# Altium PCB ProxSensorType1.PcbDoc
Units mil, origin at the board's own origin, x right, y up, seen from the top; angles counter-clockwise.
Board outline 1300 x 2050 mil, 2 copper layers (Top Layer, Bottom Layer); 28 components, 23 nets, 78 pads, 14 vias.
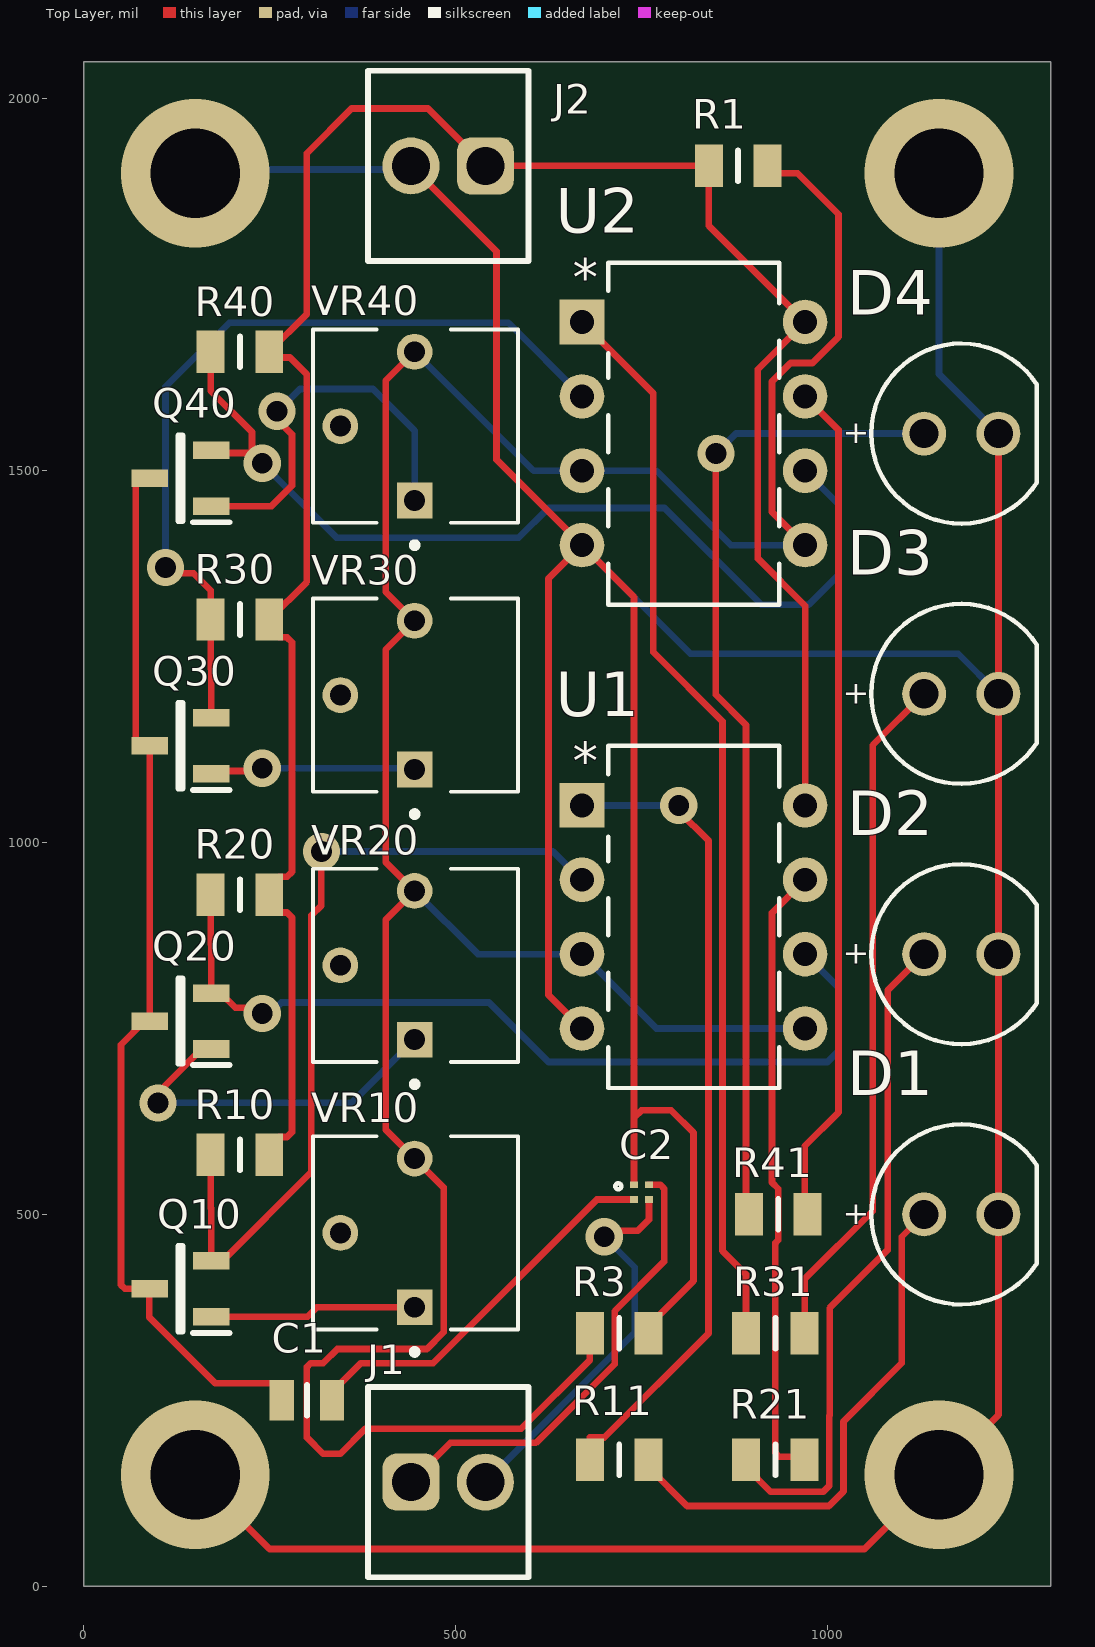
[diagram p0: Top Layer view]
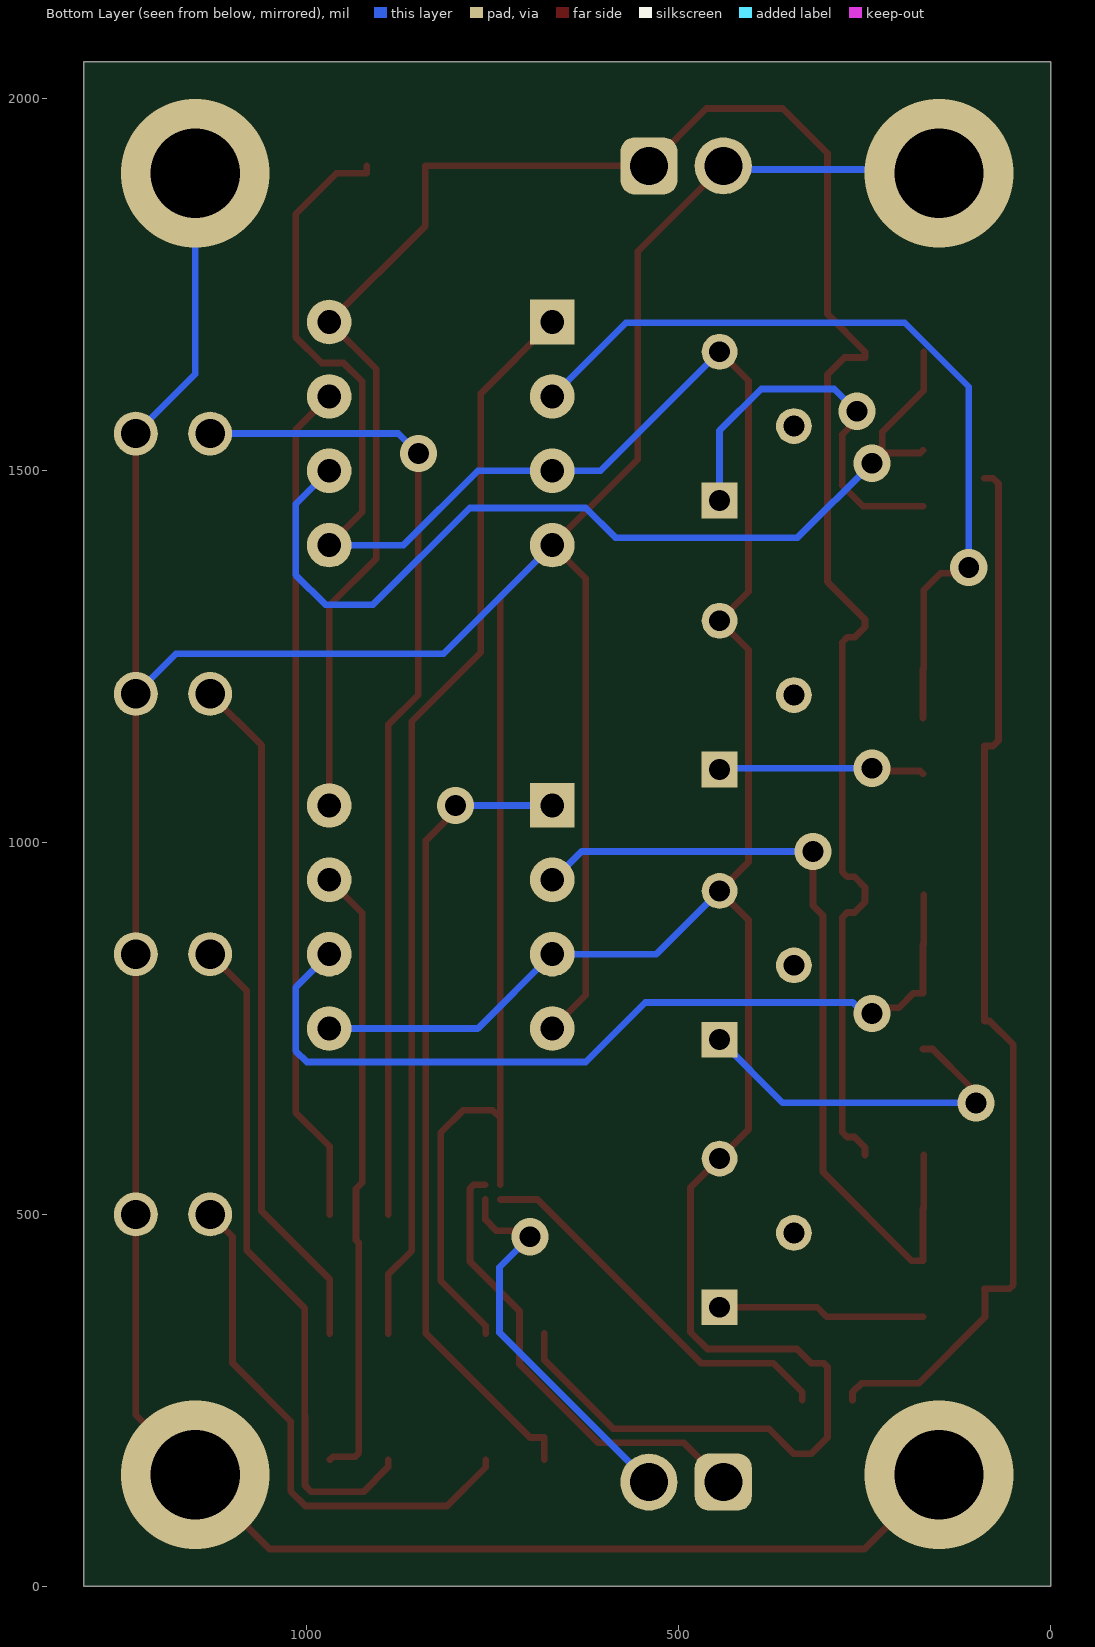
[diagram p1: Bottom Layer view, seen from below]
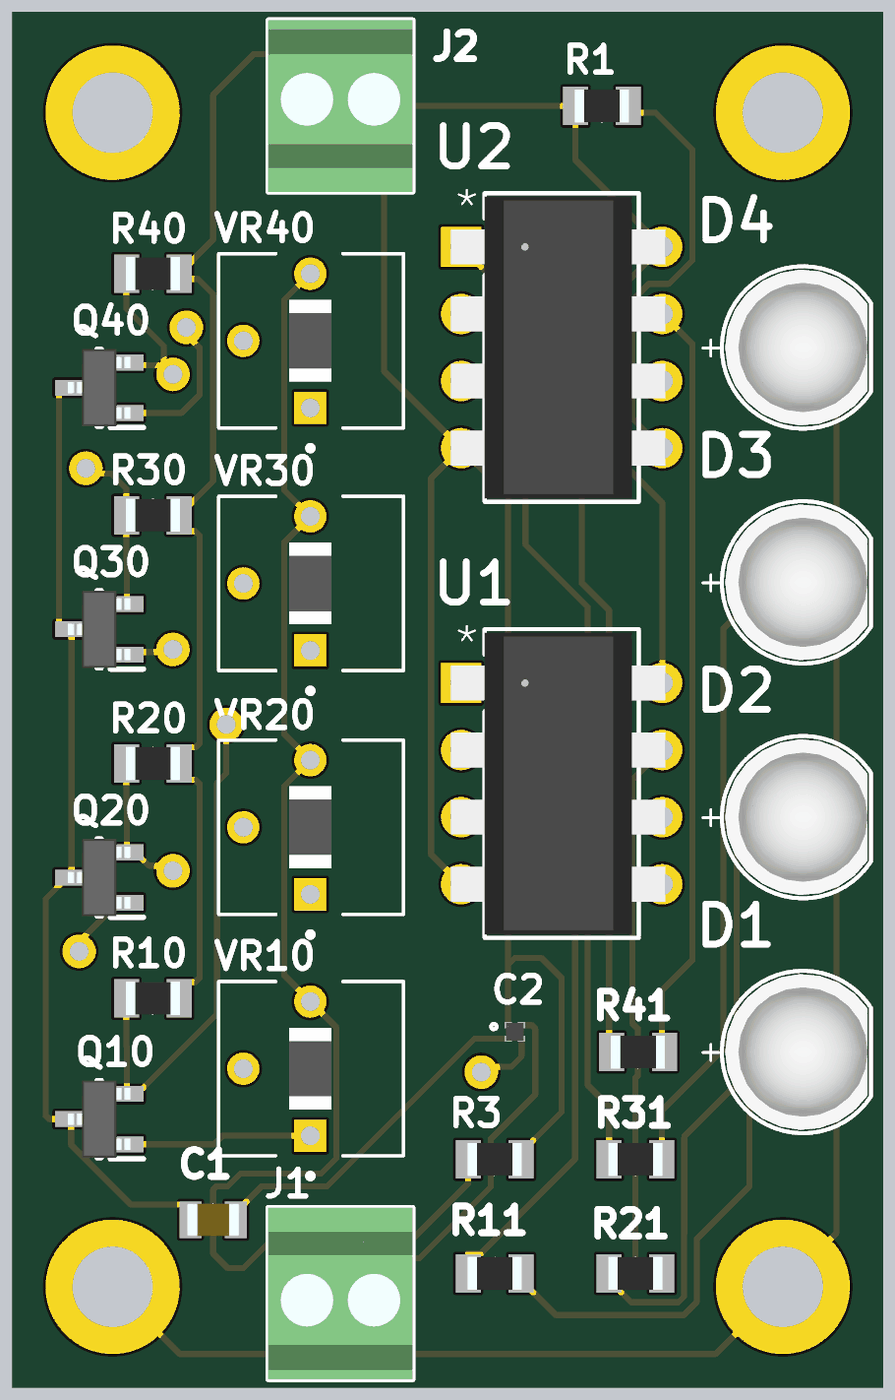
[diagram p2: 3D render of the assembled board from above, using the file's embedded part models]

## Layer stack, top to bottom
Top Solder: solder mask 0.4, Solder Resist, Dk 3.5
Top Layer: signal copper 1.4
Dielectric 1: dielectric 12.6, FR-4, Dk 4.8
Bottom Layer: signal copper 1.4
Bottom Solder: solder mask 0.4, Solder Resist, Dk 3.5

## Board outline
0,0 1300,0 1300,2050 0,2050

## Design rules (kind name [scope] priority, off if disabled: settings)
Clearance [All] p1: gap=10 ignorepadtopadclearanceinfootprint=FALSE except(0: Arc-Hole Track-Hole SMDPad-Hole THPad-Hole Via-Hole Fill-Hole Poly-Hole Region-Hole Text-Hole; 6: SMDPad-SMDPad SMDPad-Fill SMDPad-Poly SMDPad-Region; 7: SMDPad-THPad SMDPad-Via)
HoleSize [All] p1: absolutevalues=TRUE maxlimit=150 minlimit=1 maxpercent=80.000 minpercent=20.000
MinimumSolderMaskSliver [All] p1: minsoldermaskwidth=9
PolygonConnect [All] p1: connectstyle=Relief reliefconductorwidth=10 reliefentries=4 polygonreliefangle="90 Angle" airgapwidth=10
RoutingCorners [All] p1: cornerstyle=45-Degree minsetback=100 maxsetback=300
RoutingVias [All] p1: holewidth=28 width=50 viastyle="Through Hole" minholewidth=28 minwidth=50 maxholewidth=35 maxwidth=100
SMDNeckDown [All] p1: percent=100.000
SilkToSilkClearance [All] p1: silktosilkclearance=0.1
SilkToSolderMaskClearance [IsPad] p1: minsilkscreentomaskgap=4 clearancetoexposedcopper=TRUE
SolderMaskExpansion [All] p1: expansion=4 istentingtop=FALSE
UnRoutedNet [All] p1: checkbadconnections=TRUE
Width [All] p1: maxlimit=30 minlimit=7 preferedwidth=9 minimp=50.000000 maximp=50.000000 favimp=50.000000
24 further rules are at their usual default settings.

## Components (designator, comment, footprint, x,y, rotation, side; value= is the part's Value field where it differs from the comment)
C1 "TMK212BBJ106MG-T" CAPC2012X65N 300,250 r180 top
C2 "LXRW0YV900-053" LXRW-0Y_MUR-M 750,530 r0 top
D1 "Super Red, 2.1V, 40°" WL-TMRC_D5.9H8.7 1180,500 r0 top
D2 "Super Red, 2.1V, 40°" WL-TMRC_D5.9H8.7 1180,850 r0 top
D3 "Super Red, 2.1V, 40°" WL-TMRC_D5.9H8.7 1180,1200 r0 top
D4 "Super Red, 2.1V, 40°" WL-TMRC_D5.9H8.7 1180,1550 r0 top
J1 "691210910002" 691210910002 490,140 r0 top
J2 "691210910002" 691210910002 490,1910 r180 top (schematic designator J?)
Q10 "MMBFJ309LT1G" SOT96P237X111-3N 130,400 r180 top
Q20 "MMBFJ309LT1G" SOT96P237X111-3N 130,760 r180 top
Q30 "MMBFJ309LT1G" SOT96P237X111-3N 130,1130 r180 top
Q40 "MMBFJ309LT1G" SOT96P237X111-3N 130,1490 r180 top
R1 "4,7k" RESC2012X50N 880,1910 r180 top
R3 "10k" RESC2012X50N 720,340 r180 top
R10 "4,7k" RESC2012X50N 210,580 r0 top
R11 "12k" RESC2012X50N 720,170 r180 top
R20 "4,7k" RESC2012X50N 210,930 r0 top
R21 "12k" RESC2012X50N 930,170 r0 top
R30 "4,7k" RESC2012X50N 210,1300 r0 top
R31 "12k" RESC2012X50N 930,340 r180 top
R40 "4,7k" RESC2012X50N 210,1660 r0 top
R41 "12k" RESC2012X50N 933.83,500 r0 top
U1 "LM358" DIP8_300 970,750 r0 top
U2 "LM358" DIP8_300 970,1400 r0 top
VR10 "3362P-1-253LF" TRIM_3362P-1-253LF 445,475.12 r90 top
VR20 "3362P-1-253LF" TRIM_3362P-1-253LF 445,835 r90 top
VR30 "3362P-1-253LF" TRIM_3362P-1-253LF 445,1198.33 r90 top
VR40 "3362P-1-253LF" TRIM_3362P-1-253LF 445,1560 r90 top

## Footprints (in the part's own frame and the unit in brackets; to place one, negate y for a bottom-side part, rotate by r counter-clockwise, add the part's x,y. Pads: shape width x height; smd on the part's side, far side on the other; paste and mask are expansions set on the pad)
691210910002 [mm] "2,54mm - modular - green - Horizontal wire entry - Cage clamp - 0,8mm2 wires - 02p"
  rrect50% 1.95x1.95 hole 1.3: 1(-1.27,0)
  round 1.95 hole 1.3: 2(1.27,0)
  silkscreen extent -2.74,-3.25 2.74,3.25, body extent -2.74,-3.25 2.74,3.25, height 8.55
CAPC2012X65N [mm]
  rect 0.83x1.39 smd: 1(-0.86,0) 2(0.86,0)
  silkscreen extent 0,-0.53 0,0.53, body extent -1,-0.63 1,0.63, height 0.65
DIP8_300 [mil]
  rect 60x60 hole 32: 1(-300,300)
  round 60 hole 32: 2(-300,200) 3(-300,100) 4(-300,0) 5(0,0) 6(0,100) 7(0,200) 8(0,300)
  silkscreen extent -265,-80 -35,380, body extent -315,-75 5,375, height 205
LXRW-0Y_MUR-M [mil]
  rect 11x9 smd paste+0 mask+0: 1(-10,10) 2(-10,-10) 3(10,-10) 4(10,10)
  silkscreen extent -35,4 -27,12, body extent -13,-13 13,13, height 12
RESC2012X50N [mm]
  rect 0.95x1.45 smd: 1(-1,0) 2(1,0)
  silkscreen extent 0,-0.53 0,0.53, body extent -1.02,-0.63 1.02,0.63, height 0.5
SOT96P237X111-3N [mm]
  rect 1.25x0.6 smd: 1(-1.05,0.955) 2(-1.05,-0.955) 3(1.05,0)
  silkscreen extent -1.67,-1.46 0.07,1.51, body extent -1.18,-1.46 1.18,1.46, height 1.11
TRIM_3362P-1-253LF [mil]
  rect 48.11x48.11 hole 28.11: 1(-100,0)
  round 48.11 hole 28.11: 2(0,100) 3(100,0)
  silkscreen extent -164,-139 130,137, body extent -61,-31 61,31, height 26
WL-TMRC_D5.9H8.7 [mm] "THT Mono-color Round Color LED, 2-leads"
  round 1.5 hole 1: 1(-1.27,0) 2(1.27,0)
  silkscreen extent -3.07,-3.07 2.58,3.08, body extent -2.95,-2.95 2.45,2.95, height 9.2

## Part data
C1: "Capacitor", Manufacturer_Name="TAIYO YUDEN", Mouser Part Number=963-TMK212BBJ106MG-T, Datasheet Link=https://ds.yuden.co.jp/TYCOMPAS/ut/download?pn=LMK063BBJ474MPLF&fileType=CA, Height=1.45mm, Manufacturer_Part_Number=TMK212BBJ106MG-T, Mouser Price/Stock=https://www.mouser.co.uk/ProductDetail/Taiyo-Yuden/TMK212BBJ106MG-T?qs=lkMpTOwszhd%2F%252Bg1AlFV9dw%3D%3D
C2: "Cap trimmer (variable capacitor)", Mfr_Name=Murata, Copyright="Copyright (C) 2023 Ultra Librarian. All rights reserved.", Digi-Key_Part_Number_1=490-18380-2-ND, Digi-Key_Part_Number_2=490-18380-1-ND, Digi-Key_Part_Number_3=490-18380-6-ND, Manufacturer_Part_Number=LXRW0YV900-053, RefDes=RefDes, Type=DEV
D1 D2 D3 D4: library part LED_151051SS04000, "WL-TMRC Mono-color Round Color, THT, D5.9 x H8.7mm, Super Red, 2.1V, 40°", Case/Size Code=5mm, Emitting Color="Super Red", Forward Voltage=2.1V, Manufacturer="Wurth Elektronik", Manufacturer Part Number=151051SS04000, Operating Temperature Max=85°C, Operating Temperature Min=-40°C, Category="Signal LEDs", Chip Technology=AlInGaP, ComponentLink1Description="Website Link", ComponentLink1URL=https://www.we-online.com/redexpert/article/151051SS04000?ad, ComponentLink2Description="Datasheet Link", ComponentLink2URL=https://www.we-online.com/redexpert/spec/151051SS04000?ad, Diameter=5.9mm, Dominant Wavelength=635nm, Height=8.7mm, Luminous Intensity=250mcd, Match Code=WL-TMRC, Mount="Through Hole", Packaging=Bulk, Peak Wavelength=640nm, Viewing Angle=40°
J1 J2: "WR-TBL Series 2109 Horizontal Entry, THT, pitch 2.54mm, 2p", Manufacturer="Wurth Elektronik", Operating Temperature Max=105°C, Operating Temperature Min=-40°C, Rated Current=6A, Working Voltage=150V, Application="Rising Cage Clamp", Category="Terminal Blocks", ComponentLink1Description="Website Link", ComponentLink1URL=https://www.we-online.com/redexpert/article/691210910002?ad, ComponentLink2Description="Datasheet Link", ComponentLink2URL=https://www.we-online.com/redexpert/spec/691210910002?ad, Manufacturer Part Number=691210910002, Match Code=WR-TBL, Modularity=No, Mount="Through Hole", Number of Pins=2, Number of Rows=1, Orientation=Horizontal, Packaging=Box, Pitch=2.54mm
Q10 Q20 Q30 Q40: "Transistor", Manufacturer_Name=onsemi, Mouser Part Number=863-MMBFJ309LT1G, Arrow Part Number=MMBFJ309LT1G, Arrow Price/Stock=https://www.arrow.com/en/products/mmbfj309lt1g/on-semiconductor, Datasheet Link=http://www.onsemi.com/pub/Collateral/MMBFJ309LT1-D.PDF, Height=1.11mm, Manufacturer_Part_Number=MMBFJ309LT1G, Mouser Price/Stock=https://www.mouser.co.uk/ProductDetail/onsemi/MMBFJ309LT1G?qs=HVbQlW5zcXXpftXEfcBAsg%3D%3D
R1 R10 R20 R30 R40: library part "RESISTOR 0805", "4,7k Resistor 0805", Manufacturer="Vishay Dale", Part Number=TNPW080510K0BETA
R3: library part "RESISTOR 0805", "10k Resistor 0805", Manufacturer="Vishay Dale", Part Number=TNPW080510K0BETA
R11 R21 R31 R41: library part "RESISTOR 0805", "12k Resistor 0805", Manufacturer="Vishay Dale", Part Number=TNPW080510K0BETA
U1 U2: "Texas instruments LM358 opamp", Mfr_Name="Texas Instruments", Copyright="Copyright (C) 2023 Ultra Librarian. All rights reserved.", Manufacturer_Part_Number=LM358, RefDes=RefDes, Type=DEV
VR10 VR20 VR30 VR40: "25 kOhms 0.5W, 1/2W PC Pins Through Hole Trimmer Potentiometer Cermet 1 Turn Top Adjustment", Package="3116 Bourns", Availability=Good, Check_prices=https://www.snapeda.com/parts/3362P-1-253LF/Bourns/view-part/493663/?ref=eda, MF=Bourns, MP=3362P-1-253LF, Price=None, Purchase-URL=https://pricing.snapeda.com/search/part/3362P-1-253LF/?ref=eda, SnapEDA_Link=https://www.snapeda.com/parts/3362P-1-253LF/Bourns/view-part/493663/?ref=snap

## Via types
v1: diameter 50, hole 28, Top Layer to Bottom Layer, 10 vias
v2: diameter 200, hole 120, Top Layer to Bottom Layer, 4 vias

## Nets (pads, with @x,y where several pads share a name; then routed paths per layer and width w, separated by ;. In a path a pad name is that pad's centre, name@x,y a point inside that pad or via, vN(x,y) a via of type N, cw(c..) or ccw(c..) an arc to the next point about the centre after c; other vN are vias at no path point)
+12: J2.1 R1.2 R10.2 R20.2 R30.2 R40.2 U1.8 U2.8 | length 3063.6
  Top Layer w9: R10.2 249.37,589.84 263.57,604.04 273.41,604.04 280,610.63 280,899.37 273.41,905.96 263.57,905.96 249.37,920.16 249.37,939.84 263.57,954.04 273.41,954.04 280,960.63 280,1269.37 273.41,1275.96 263.57,1275.96 249.37,1290.16 R30.2 300,1350.63 300,1629.5 277.24,1652.26 249.37,1652.26 R40.2 300,1710.63 300,1927 360,1987 463,1987 J2.1 R1.2 840.63,1829.37 U2.8 906.5,1636.5 906.5,1381.9 970,1318.4 U1.8
GND: C2.1 D1.2 D2.2 D3.2 D4.2 J2.2 R3.1 U1.4 U2.4 | length 6409.3
  Top Layer w9: v2(150,150) 250,50 1050,50 v2(1150,150) 1150,150.5 1230.01,230.51 D1.2 D2.2 D3.2 D4.2 ; J2.2 555,1795 555,1515 U2.4 ; U1.4 625,795 625,1355 U2.4 ; C2.1 740,630 ; R3.1 759.37,350 820,410.63 820,610 790,640 750,640 740,630 ; U2.4 740,1330 740,630
  Bottom Layer w9: v2(150,1900) 155,1905 435,1905 J2.2 ; U2.4 816,1254 1176.01,1254 D3.2 ; v2(1150,1900) 1150,1630.01 D4.2
NetC1_1: C1.1 C2.2 | length 523.9
  Top Layer w9: C1.1 333.86,261.02 372.83,300 470,300 690,520 C2.2@739.5,520
NetC1_2: C1.2 Q10.3 Q20.3 Q30.3 Q40.3 | length 1443.3
  Top Layer w9: Q10.3 Q10.3@88,400 ; Q40.3 77.31,1490 70,1482.69 70,1137.31 77.31,1130 Q30.3 Q20.3 81.83,760 50,728.17 50,405.27 55.27,400 Q10.3@88,400 ; C1.2 266.14,261.02 254.3,272.86 177.14,272.86 88,362 Q10.3@88,400
NetC2_3: C2.3 J1.2 | length 526.8
  Top Layer w9: v1(700,470) 707.84,477.84 744.84,477.84 760,493 C2.3
  Bottom Layer w9: J1.2 741,341 741,429 v1(700,470)
NetC2_4: C2.4 J1.1 | length 625.9
  Top Layer w9: J1.1 492.89,192.89 608,192.89 714,298.89 714,370 780.5,436.5 780.5,534.73 775.23,540 C2.4
NetD1_1: D1.1 R11.1 | length 719.2
  Top Layer w9: R11.1 759.37,160 811.41,107.96 907.96,107.96 1001.95,107.96 1021.57,127.58 1021.57,221.57 1100,300 1100,470 D1.1
NetD2_1: D2.1 R21.1 | length 906.4
  Top Layer w9: R21.1 890.63,160.16 923.83,126.96 994.08,126.96 1002.57,135.45 1002.57,229.44 1003,229.87 1003,374 1081,452 1081,801 D2.1
NetD3_1: D3.1 R31.1 | length 926.5
  Top Layer w9: R31.1 969.37,413 1061,504.63 1061,1131 D3.1
NetD4_1: D4.1 R41.1 | length 1331
  Top Layer w9: v1(850,1523) 850,1198.87 890.63,1158.24 R41.1@890.63,500
  Bottom Layer w9: v1(850,1523) 877.01,1550.01 D4.1
NetQ10_1: Q10.1 VR10.1 | length 278.9
  Top Layer w9: Q10.1 301,362.4 313.72,375.12 VR10.1
NetQ10_2: Q10.2 R10.1 U1.2 | length 1129.6
  Top Layer w9: R10.1 170.63,508.71 171.34,508 Q10.2 186.6,437.6 306,557 306,902 319.5,915.5 v1(319.5,988)
  Bottom Layer w9: v1(319.5,988) 630.79,988 668.79,950 U1.2
NetQ20_1: Q20.1 VR20.1 | length 489.7
  Top Layer w9: v1(100,650) 107.84,657.84 107.84,671.7 158.54,722.4 Q20.1
  Bottom Layer w9: v1(100,650) 360,650 VR20.1
NetQ20_2: Q20.2 R20.1 U1.6 | length 1182
  Top Layer w9: R20.1 170.63,863.71 171.34,863 Q20.2 184.13,797.6 203.89,777.84 232.16,777.84 v1(240,770)
  Bottom Layer w9: v1(240,770) 250.77,770 265.77,785 545,785 625,705 1000,705 1015,720 1015,805 U1.6
NetQ30_1: Q30.1 VR30.1 | length 277.5
  Top Layer w9: Q30.1 175.14,1096.2 236.2,1096.2 v1(240,1100)
  Bottom Layer w9: v1(240,1100) 443.33,1100 VR30.1
NetQ30_2: Q30.2 R30.1 U2.2 | length 1125
  Top Layer w9: v1(110,1370) 117.84,1362.16 147.84,1362.16 170.63,1339.37 R30.1 170.63,1233.71 171.34,1233 Q30.2
  Bottom Layer w9: v1(110,1370) 110,1613 196,1699 571,1699 U2.2
NetQ40_1: Q40.1 VR40.1 | length 543
  Top Layer w9: Q40.1 252.4,1452.4 280,1480 280,1548.91 260,1568.91 v1(260,1580)
  Bottom Layer w9: v1(260,1580) 260.81,1580 290.81,1610 389,1610 445,1554 VR40.1
NetQ40_2: Q40.2 R40.1 U2.6 | length 1297.2
  Top Layer w9: R40.1 170.63,1607.66 226.2,1552.09 v1@226.2,1523.8 ; Q40.2 175.14,1523.8 v1@226.2,1523.8 ; v1(240,1510) v1@226.2,1523.8
  Bottom Layer w9: v1(240,1510) 340,1410 585,1410 625,1450 781,1450 911,1320 975,1320 1015,1360 1015,1455 U2.6
NetR1_1: R1.1 R3.2 U1.3 U1.5 U2.3 U2.5 VR10.3 VR20.3 VR30.3 VR40.3 | length 4087.9
  Top Layer w9: VR40.3 406,1621 406,1337.33 VR30.3 406,1259.33 406,974 VR20.3 406,896 406,614.12 VR10.3 484,536.12 484,341.58 461.42,319 341,319 322,300 305.27,300 300,294.73 300,200 322,178 345,178 378.89,211.89 588.26,211.89 680.63,304.26 R3.2 ; R1.1 919.37,1900 960,1900 1015,1845 1015,1680 980,1645 950.5,1645 925.5,1620 925.5,1444.5 U2.5
  Bottom Layer w9: VR20.3 530,850 U1.3 770,750 U1.5 ; VR40.3 605,1500 U2.3 770,1500 870,1400 U2.5
NetR11_2: R11.2 U1.1 | length 1103.9
  Top Layer w9: R11.2 680.63,200 700,200 840,340 840,1002.73 800,1042.73 v1(800,1050)
  Bottom Layer w9: U1.1 v1(800,1050)
NetR21_2: R21.2 U1.7 | length 837.3
  Top Layer w9: R21.2 965.2,174.17 935.27,174.17 930,179.44 930,461.62 933.83,465.45 933.83,534.55 925.5,542.88 925.5,850 925.5,905.5 U1.7
NetR31_2: R31.2 U2.1 | length 1451.4
  Top Layer w9: U2.1 766,1604 766,1256 859,1163 859,451 890.63,419.37 R31.2
NetR41_2: R41.2 U2.7 | length 1137.5
  Top Layer w9: R41.2@969.37,500 969.37,591.63 1015,637.26 1015,1555 U2.7
pads on no net: VR10.2 VR20.2 VR30.2 VR40.2

## Text inside footprints (layer, text, board x,y; h text height)
D1: Top Overlay "+" at 1020.55,487.01 h31.5
D2: Top Overlay "+" at 1020.55,837.01 h31.5
D3: Top Overlay "+" at 1020.55,1187.01 h31.5
D4: Top Overlay "+" at 1020.55,1537.01 h31.5
U1: Top Overlay "*" at 657.5,1085 h50; Mechanical 13 "*" at 707.5,1025 h50
U2: Top Overlay "*" at 657.5,1735 h50; Mechanical 13 "*" at 707.5,1675 h50